# Altium PCB PCB.PcbDoc
Units mm, origin at the board's own origin, x right, y up, seen from the top; angles counter-clockwise.
Board outline 54.5 x 39 mm, 2 copper layers (Top Layer, Bottom Layer), stack 1.671 mm thick; 39 components, 21 nets, 159 pads, 13 vias.
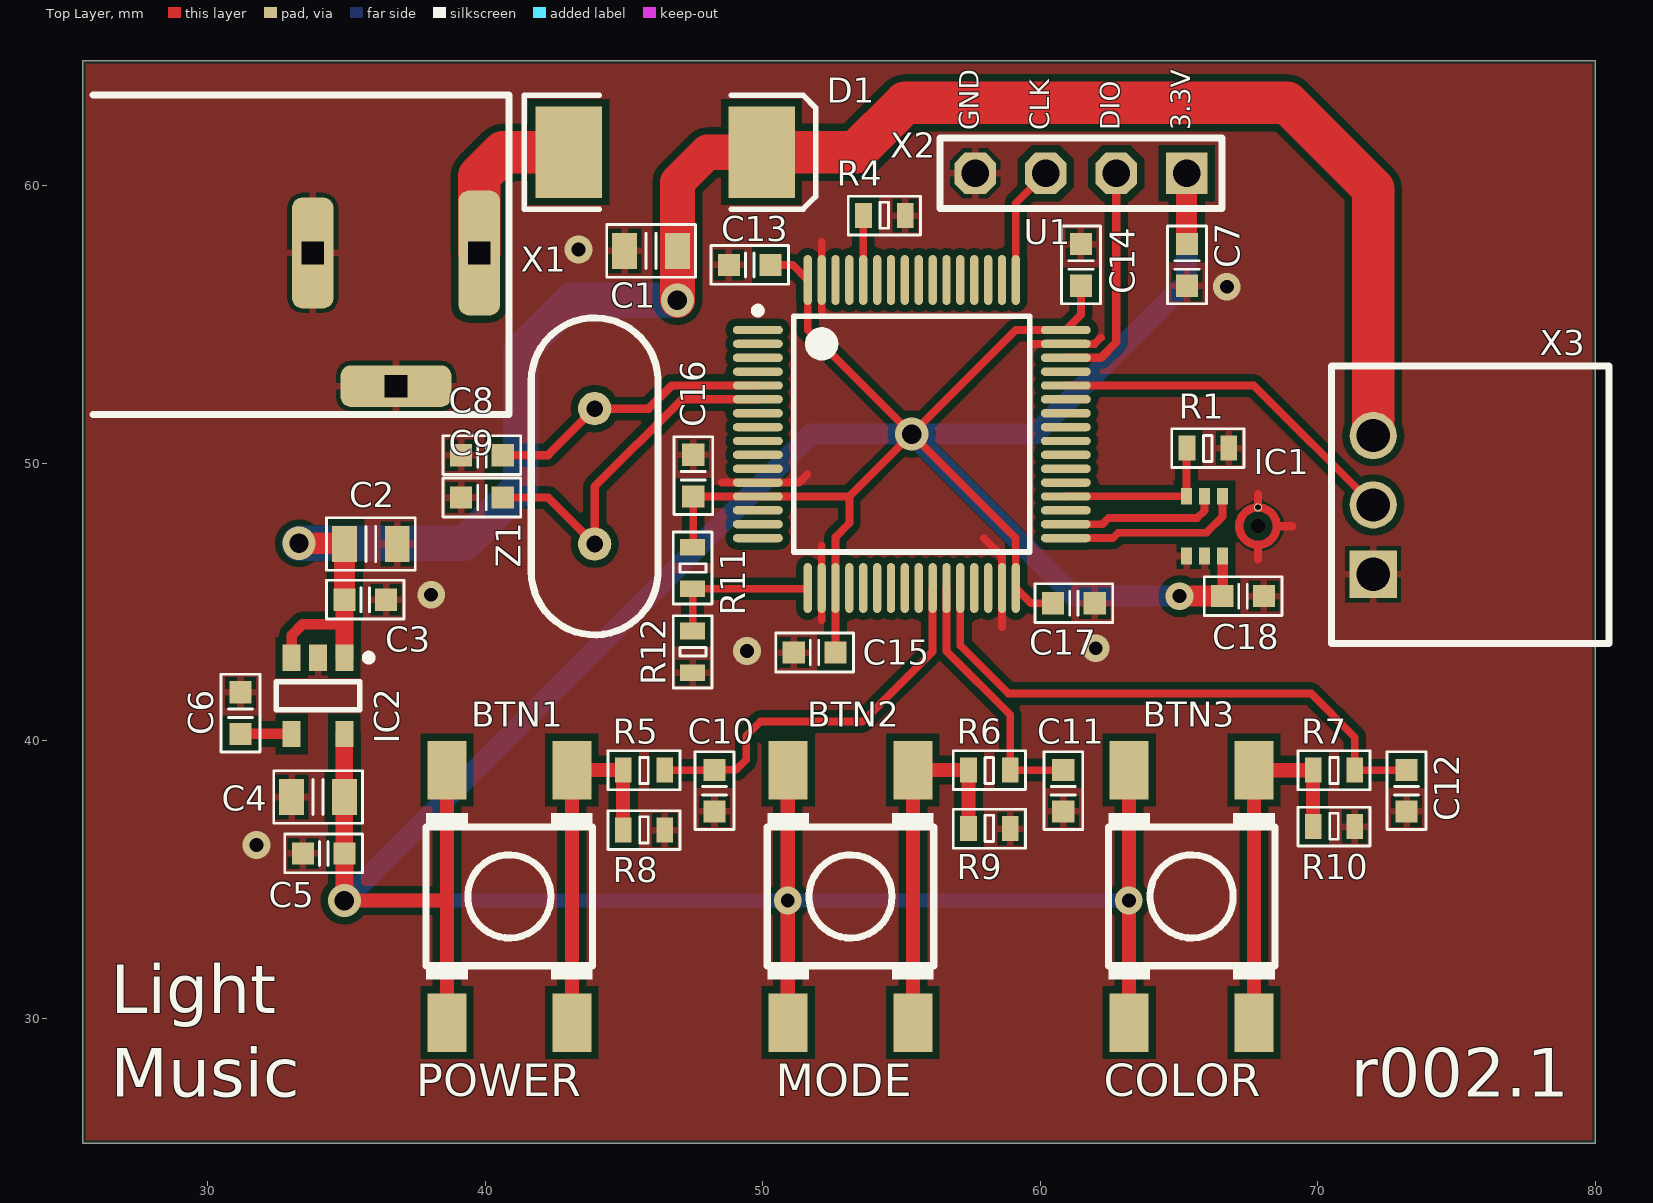
[diagram p0: Top Layer view]
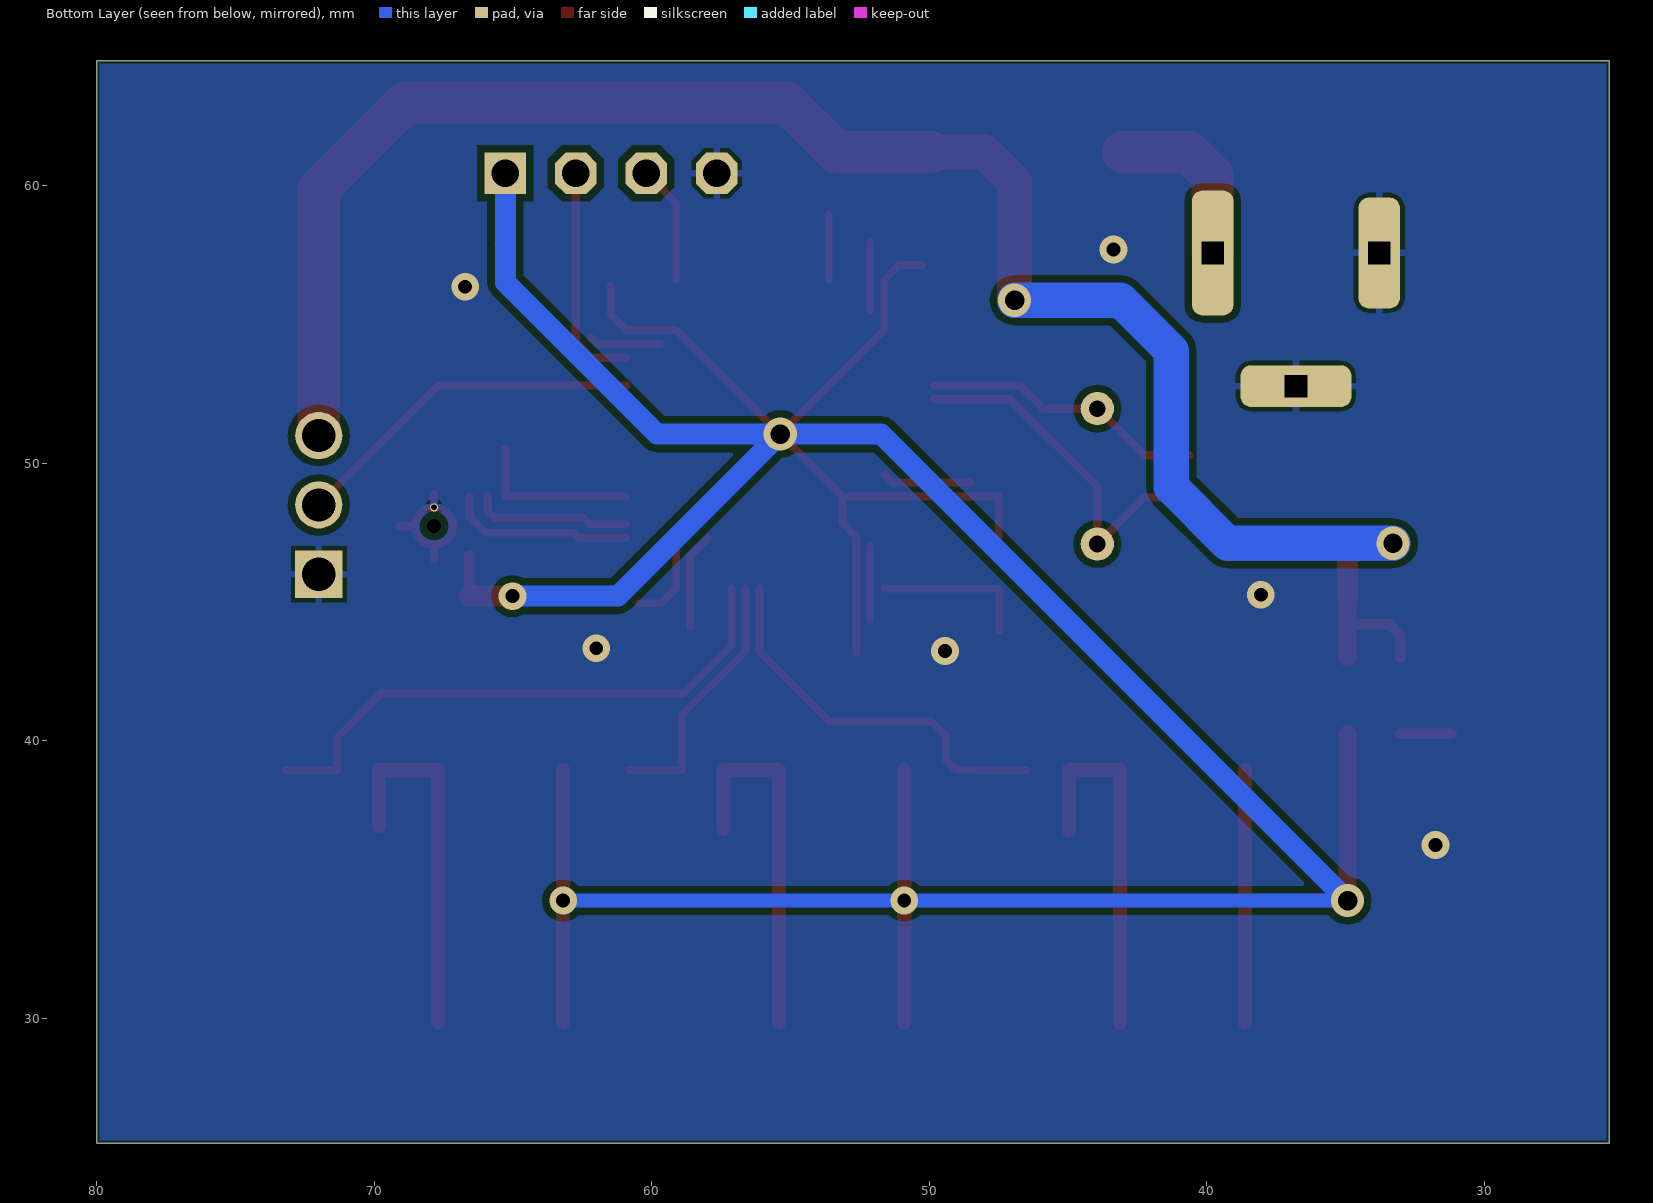
[diagram p1: Bottom Layer view, seen from below]
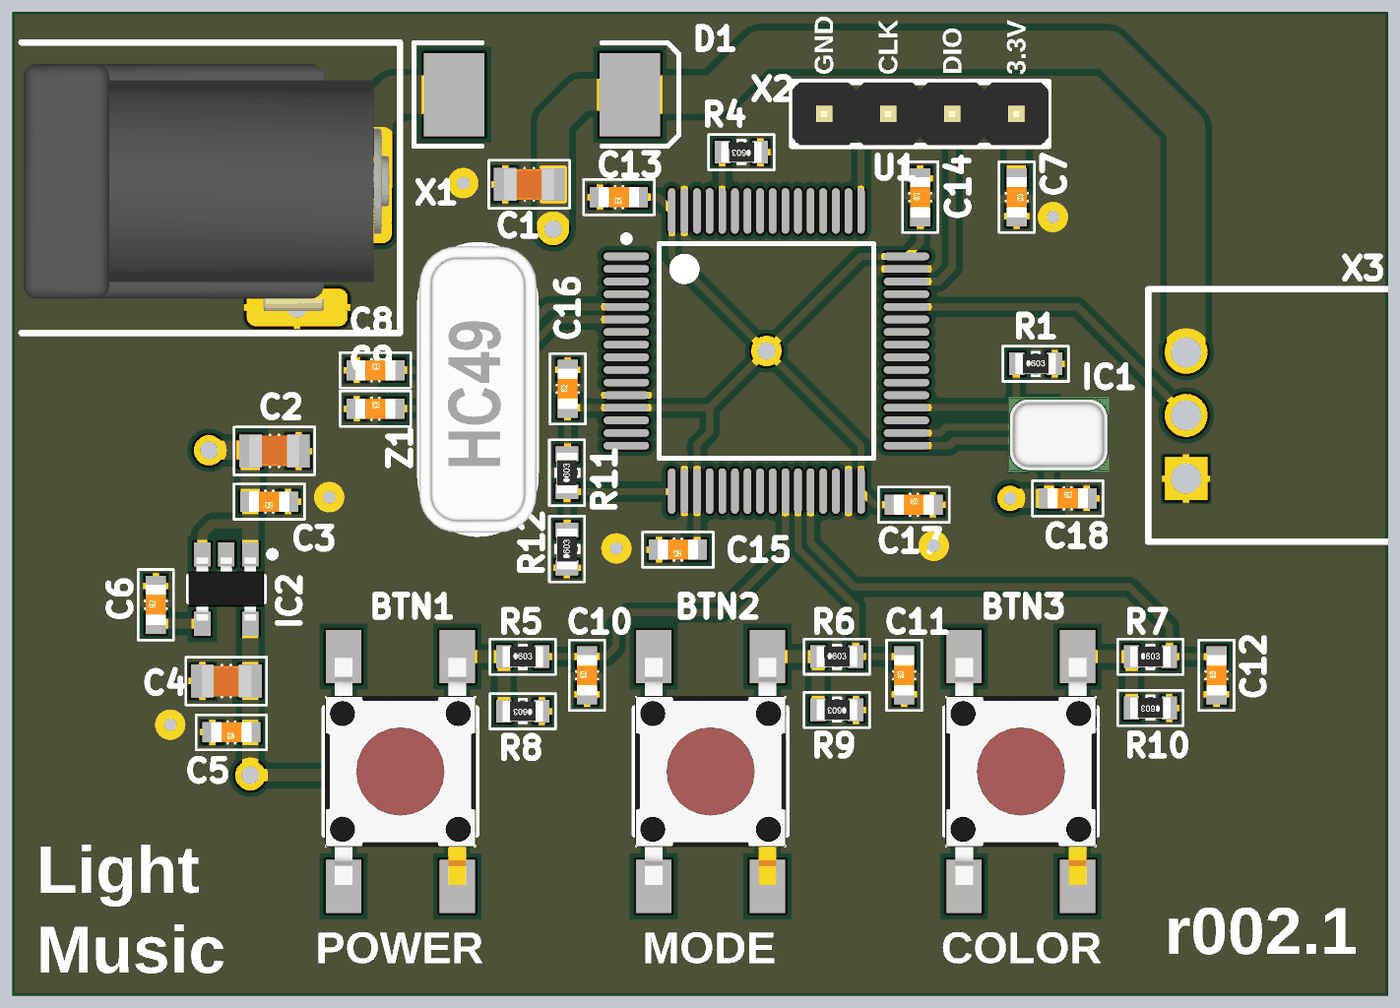
[diagram p2: 3D render of the assembled board from above, using the file's embedded part models]

## Layer stack, top to bottom
Top Solder: solder mask 0.0102, Solder Resist, Dk 3.5
Top Layer: signal copper 0.0356
Dielectric 1: dielectric 1.6, FR-4, Dk 4.8
Bottom Layer: signal copper 0.0356
Bottom Solder: solder mask 0.0102, Solder Resist, Dk 3.5

## Board outline
25.5,25.5 80,25.5 80,64.5 25.5,64.5

## Design rules (kind name [scope] priority, off if disabled: settings)
Clearance [All] p1: gap=0.152 ignorepadtopadclearanceinfootprint=FALSE except(0.254: Arc-Poly Track-Poly SMDPad-Poly THPad-Poly Via-Poly Fill-Poly Poly-Poly)
HoleSize [All] p1: absolutevalues=TRUE maxlimit=3.5 minlimit=0.025 maxpercent=80.000 minpercent=20.000
MinimumSolderMaskSliver [All] p1: minsoldermaskwidth=0
PolygonConnect [All] p1: thpad.connectstyle=Relief thpad.reliefconductorwidth=0.254 thpad.reliefentries=4 thpad.polygonreliefangle="90 Angle" thpad.airgapwidth=0.152 smdpad.connectstyle=Relief smdpad.reliefconductorwidth=0.254 smdpad.reliefentries=4 smdpad.polygonreliefangle="90 Angle" smdpad.airgapwidth=0.152 via.connectstyle=Direct via.reliefconductorwidth=0.254 via.reliefentries=4 via.polygonreliefangle="90 Angle" via.airgapwidth=0.254
RoutingVias [All] p1: holewidth=0.711 width=1.27 viastyle="Through Hole" minholewidth=0.5 minwidth=1 maxholewidth=0.711 maxwidth=1.27
SilkToSilkClearance [All] p1: silktosilkclearance=0
SilkToSolderMaskClearance [IsPad] p1: minsilkscreentomaskgap=0 clearancetoexposedcopper=TRUE
SolderMaskExpansion [All] p1: expansion=0.102
Width [All] p1: maxlimit=2 minlimit=0.2 preferedwidth=0.254
26 further rules are at their usual default settings.

## Components (designator, comment, footprint, x,y, rotation, side; value= is the part's Value field where it differs from the comment)
BTN1 "Push Button" "PUSH BUTTON" 40.869,34.392 r270 top
BTN2 "Push Button" "PUSH BUTTON" 53.162,34.392 r270 top
BTN3 "Push Button" "PUSH BUTTON" 65.456,34.392 r270 top
C1 "1u" C_0805 45.974,57.658 r0 top
C2 "1u" C_0805 35.877,47.092 r180 top
C3 "0.1u" C_0603 35.674,45.085 r180 top
C4 "10u" C_0805 33.972,37.973 r0 top
C5 "0.1u" C_0603 34.175,35.941 r180 top
C6 "22n" C_0603 31.178,40.996 r90 top
C7 "0.1u" C_0603 65.29,57.15 r270 top
C8 "20p" C_0603 39.878,50.292 r0 top
C9 "20p" C_0603 39.878,48.768 r0 top
C10 "1u" C_0603 48.26,38.202 r90 top
C11 "1u" C_0603 60.833,38.202 r90 top
C12 "1u" C_0603 73.203,38.202 r90 top
C13 "0.1u" C_0603 49.53,57.15 r180 top
C14 "0.1u" C_0603 61.468,57.15 r90 top
C15 "0.1u" C_0603 51.867,43.18 r180 top
C16 "0.1u" C_0603 47.498,49.555 r90 top
C17 "0.1u" C_0603 61.214,44.958 r0 top
C18 "0.1u" C_0603 67.31,45.212 r0 top
D1 "Diode" SMC 46.482,61.214 r0 top
IC1 "ICS-43432" ICS-43432 65.273,47.735 r270 top
IC2 "RT9193" SOT23 33.972,41.621 r270 top
R1 "100k" R_0603 66.04,50.546 r0 top
R4 "100k" R_0603 54.381,58.928 r180 top
R5 "1k" R_0603 45.72,38.938 r0 top
R6 "1k" R_0603 58.166,38.942 r0 top
R7 "1k" R_0603 70.587,38.938 r0 top
R8 "10k" R_0603 45.72,36.776 r180 top
R9 "10k" R_0603 58.166,36.83 r180 top
R10 "10k" R_0603 70.587,36.906 r180 top
R11 "1k" R_0603 47.473,46.228 r90 top
R12 "3k" R_0603 47.473,43.205 r90 top
U1 "STM32F105R8T6" STM-LQFP64_N 55.372,51.054 r0 top
X1 "Jack Female" DC-140 36.782,52.782 r0 top
X2 "PLS-4" PLS-4 61.468,60.452 r270 top
X3 "DG-300-3" YH-XH-3 72,48.5 r0 top
Z1 "72MHz" HC-49 43.942,49.53 r90 top

## Footprints (in the part's own frame and the unit in brackets; to place one, negate y for a bottom-side part, rotate by r counter-clockwise, add the part's x,y. Pads: shape width x height; smd on the part's side, far side on the other; paste and mask are expansions set on the pad)
C_0603 [mm] "Chip Capacitor; Body 1.6 x 0.8 mm (LxW typ)"
  rect 0.8x0.8 smd: 1(-0.75,0) 2(0.75,0)
  silkscreen extent -1.4,-0.7 1.4,0.7, body extent -0.8,-0.4 0.8,0.4, height 0.3
C_0805 [mm] "Capacitor Pattern"
  rect 0.9x1.3 smd: 1(-0.95,0) 2(0.95,0)
  silkscreen extent -1.6,-0.95 1.6,0.95, body extent -1,-0.63 1,0.62, height 0.6
DC-140 [mm]
  rrect50% 1.5x4.5 hole 0.8 square: 1(3,4.8)
  rrect50% 1.5x4 hole 0.8 square: 2(-3,4.8)
  rrect50% 4x1.5 hole 0.8 square: 3(0,0)
  silkscreen extent -10.92,-1.02 4.06,10.5, body extent -10.85,-0.15 3.65,9.65, height 11
HC-49 [mm]
  round 1.2 hole 0.6: 1(-2.44,0) 2(2.44,0)
  silkscreen extent -5.71,-2.29 5.71,2.29, body extent -5.67,-2.32 5.68,2.33, height 3.6
ICS-43432 [mm]
  round 0 hole 0.5 unplated: 0(0,2.575)
  rect 0.6x0.4 smd: 1(1.075,0) 2(1.075,0.65) 3(1.075,1.3) 5(-1.075,1.3) 6(-1.075,0.65) 7(-1.075,0)
  round 0.3 hole 0.2: 4(-0.675,2.575)
  Top Layer lines w0.3: 0.675,2.575 ccw(c0,2.575) 0,3.25 ccw(c0,2.575) -0.675,2.575 ccw(c0,2.575) 0.675,2.575
  body extent -1.5,-0.32 1.5,3.68, height 1.1
PLS-4 [mm]
  rect 1.5x1.5 hole 1: 1(0,3.81)
  oct 1.5x1.5 hole 1: 2(0,1.27) 3(0,-1.27) 4(0,-3.81)
  silkscreen extent -1.27,-5.08 1.27,5.08, body extent -1.25,-5.08 1.24,5.08, height 8.54
"PUSH BUTTON" [mm]
  rect 2.1x1.4 smd: 1(-4.55,2.25) 1(4.55,2.25) 2(-4.55,-2.25) 2(4.55,-2.25)
  silkscreen extent -3,-3 3,3, body extent -4.5,-3 4.5,3, height 5
R_0603 [mm]
  rect 0.6x0.9 smd: 1(-0.75,0) 2(0.75,0)
  silkscreen extent -1.3,-0.7 1.3,0.7, body extent -0.8,-0.41 0.8,0.41, height 0.45
SMC [mm] "DO-214-AB/SMC; 2 C-Bend Leads; Body 7.9 x 5.9 mm, inc. leads (LxW)"
  rect 2.4x3.3 smd: 1(-3.475,0) 2(3.475,0)
  silkscreen extent -5.07,-2.05 5.43,2.05
SOT23 [mm] "SOT23, 5-Leads, Body 2.90x2.80mm, Pitch 0.95mm, IPC Medium Density"
  rect 0.95x0.65 smd: 1(-1.375,0.95) 2(-1.375,0) 3(-1.375,-0.95) 4(1.375,-0.95) 5(1.375,0.95)
  silkscreen extent -1.5,-1.5 0.5,1.95, body extent -1.25,-1.5 1.25,1.5, height 1.15
STM-LQFP64_N [mm] "Thin QFP, 64-Leads, Body 10x10mm, Pitch 0.5mm, IPC Medium Density"
  oval 1.8x0.3 smd: 1(-5.55,3.75) 2(-5.55,3.25) 3(-5.55,2.75) 4(-5.55,2.25) 5(-5.55,1.75) 6(-5.55,1.25) 7(-5.55,0.75) 8(-5.55,0.25) 9(-5.55,-0.25) 10(-5.55,-0.75) 11(-5.55,-1.25) 12(-5.55,-1.75) 13(-5.55,-2.25) 14(-5.55,-2.75) 15(-5.55,-3.25) 16(-5.55,-3.75) 33(5.55,-3.75) 34(5.55,-3.25) 35(5.55,-2.75) 36(5.55,-2.25) 37(5.55,-1.75) 38(5.55,-1.25) 39(5.55,-0.75) 40(5.55,-0.25) 41(5.55,0.25) 42(5.55,0.75) 43(5.55,1.25) 44(5.55,1.75) 45(5.55,2.25) 46(5.55,2.75) 47(5.55,3.25) 48(5.55,3.75)
  oval 0.3x1.8 smd: 17(-3.75,-5.55) 18(-3.25,-5.55) 19(-2.75,-5.55) 20(-2.25,-5.55) 21(-1.75,-5.55) 22(-1.25,-5.55) 23(-0.75,-5.55) 24(-0.25,-5.55) 25(0.25,-5.55) 26(0.75,-5.55) 27(1.25,-5.55) 28(1.75,-5.55) 29(2.25,-5.55) 30(2.75,-5.55) 31(3.25,-5.55) 32(3.75,-5.55) 49(3.75,5.55) 50(3.25,5.55) 51(2.75,5.55) 52(2.25,5.55) 53(1.75,5.55) 54(1.25,5.55) 55(0.75,5.55) 56(0.25,5.55) 57(-0.25,5.55) 58(-0.75,5.55) 59(-1.25,5.55) 60(-1.75,5.55) 61(-2.25,5.55) 62(-2.75,5.55) 63(-3.25,5.55) 64(-3.75,5.55)
  silkscreen extent -5.67,-4.25 4.25,4.57, body extent -5,-5 5,5, height 1.6
YH-XH-3 [mm]
  rect 1.7x1.7 hole 1.2 unplated: 1(0,-2.5)
  round 1.7 hole 1.2 unplated: 2(0,0) 3(0,2.5)
  silkscreen extent -1.5,-5 8.5,5

## Part data
BTN1 BTN2 BTN3: "Push button"
C1 C2 C4: library part C0805, "Capacitor"
C3 C5 C6 C7 C8 C9 C10 C11 C12 C13 C14 C15 C16 C17 C18: library part C0603, "Capacitor"
D1: "Default Diode", Code_JEDEC=DO-214-AB, LatestRevisionDate=17-Jul-2002, LatestRevisionNote="Re-released for DXP Platform.", PackageDescription="DO-214-AB/SMC; 2 C-Bend Leads; Body 7.9 x 5.9 mm, inc. leads (LxW)", PackageReference=SMC, PackageVersion=Sep-1996, Published=8-Jun-2000, Publisher="Altium Limited"
IC1: "Low-Noise Microphone with I2  S Digital Output"
IC2: "300mA, CMOS LDO Regulator"
R1 R4 R5 R6 R7 R8 R9 R10 R11 R12: library part R0603, "Resistor"
U1: "ARM Cortex-M3 32-bit MCU, 64 KB Flash, 64 KB Internal RAM, 51 I/Os, 64-pin LQFP, -40 to 85 degC, Tray", I/Os (High Current)=51, Operating Frequency(F) (Processor speed) (MHz)=72, Supplier Part Number 1=497-8922-ND, Supply Voltage(Vcc) min (V)=2, A/D Converter="2x12-bit (16 Channel)", ComponentLink1Description="Manufacturer URL", ComponentLink1URL=http://www.st.com/web/en/home.html, ComponentLink2Description=Datasheet, ComponentLink2URL=http://www.st.com/st-web-ui/static/active/en/resource/technical/document/datasheet/CD00220364.pdf, ComponentLink3Description="Package Specification", ComponentLink3URL=http://www.st.com/st-web-ui/static/active/en/resource/technical/document/datasheet/DM00037051.pdf, Core="ARM Cortex-M3", D/A Converter="2x12-bit (2 Channel)", DatasheetVersion="Rev. 6", FLASH Size (Prog) (kB)=64, Internal RAM Size (kB)=64, Mounting Technology="Surface Mount", PackageDescription="64-Pin Low Profile Quad Flat Package, 10 x 10 mm Body, 0.5 mm Pitch", PackageReference=LQFP64, PackageVersion="Rev. 4, 06/2013", Packing=Tray, PartNumber=STM32F105R8T6, Supplier 1=Digi-Key, Supplier 2=Farnell, Supplier 3=Newark, Supplier 4=Newark, Supplier 5=Mouser, Supplier Part Number 2=1737131, Supplier Part Number 3=52R2327, Supplier Part Number 4=25R9439, Supplier Part Number 5=511-STM32F105R8T6
Z1: library part XTAL, "Quartz resonator"

## Via types
v1: diameter 1, hole 0.5, Top Layer to Bottom Layer, 9 vias
v2: diameter 1.2, hole 0.7, Top Layer to Bottom Layer, 4 vias

## Nets (pads, with @x,y where several pads share a name; then routed paths per layer and width w, separated by ;. In a path a pad name is that pad's centre, name@x,y a point inside that pad or via, vN(x,y) a via of type N, cw(c..) or ccw(c..) an arc to the next point about the centre after c; other vN are vias at no path point)
3.3V: BTN1.2 BTN2.2 BTN3.2 C4.2 C5.1 C7.1 C13.1 C14.1 C15.1 C16.1 C17.1 C18.1 IC1.3 IC2.5 R11.2 U1.13 U1.19 U1.32 U1.48 U1.64 X2.1 | length 169.1
  Top Layer w0.279: R11.2@47.473,47.08 47.498,47.105 C16.1 ; C16.1 47.501,48.804 U1.13 53.122,48.804 ; C13.1 51.076,57.15 U1.64 51.622,54.804 v2(55.372,51.054) ; C15.1 52.622,43.185 U1.19 52.622,47.34 53.122,47.84 53.122,48.804 ; C17.1 59.668,44.958 U1.32 59.122,47.304 v2(55.372,51.054) ; C14.1 61.468,55.35 U1.48 59.122,54.804 v2(55.372,51.054) ; 53.122,48.804 v2(55.372,51.054)
  Top Layer w0.381: C18.1@66.573,45.225 IC1.3
  Top Layer w0.508: v2(34.922,34.239) 38.619,34.239 ; BTN1.2@38.619,29.842 38.619,34.239 ; BTN1.2@38.619,38.942 38.619,34.239 ; BTN2.2@50.912,29.842 50.902,29.852 v1(50.902,34.239) 50.902,38.931 BTN2.2@50.912,38.942 ; BTN3.2@63.206,29.842 63.195,29.852 v1(63.195,34.239) 63.195,38.931 BTN3.2@63.206,38.942 ; C18.1 C18.1@66.573,45.225
  Top Layer w0.635: v2(34.922,34.239) 34.925,34.242 C5.1 ; C5.1@34.922,35.944 C4.2 IC2.5
  Top Layer w0.762: v1(65.024,45.212) C18.1 ; X2.1 65.278,57.912 C7.1
  Bottom Layer w0.508: v2(34.922,34.239) v1(50.902,34.239) v1(63.195,34.239)
  Bottom Layer w0.762: v2(34.922,34.239) 51.737,51.054 v2(55.372,51.054) ; v1(65.024,45.212) 61.214,45.212 v2(55.372,51.054) ; X2.1 65.278,56.515 59.817,51.054 v2(55.372,51.054)
5V: C1.2 C2.2 C3.2 D1.2 IC2.1 IC2.3 X3.3 | length 69.4
  Top Layer w0.381: IC2.3 33.022,43.805 33.413,44.196 34.924,44.196
  Top Layer w0.635: IC2.1 IC2.1 34.924,44.196 C3.2
  Top Layer w0.762: v2(33.286,47.117) C2.2@34.927,47.117 ; C3.2 34.927,45.088 C2.2
  Top Layer w1.27: v2(46.924,55.88) C1.2 46.924,60.132 48.006,61.214 D1.2
  Top Layer w1.524: D1.2 53.352,61.214 55.13,62.992 68.908,62.992 72,59.9 X3.3
  Bottom Layer w1.27: v2(33.286,47.117) 39.243,47.117 41.275,49.149 41.275,54.051 43.104,55.88 v2(46.924,55.88)
BUTTON1: C10.2 R5.2 U1.26 | length 14.2
  Top Layer w0.279: R5.2 C10.2@48.247,38.938 ; C10.2 49.035,38.952 49.403,39.319 49.403,40.183 49.911,40.691 53.594,40.691 56.122,43.219 U1.26
  Top Layer w0.3: C10.2@48.247,38.938 C10.2
BUTTON2: C11.2 R6.2 U1.27 | length 9.4
  Top Layer w0.279: U1.27 56.622,43.225 58.916,40.931 R6.2 60.823,38.942 C11.2
BUTTON3: C12.2 R7.2 U1.28 | length 20.7
  Top Layer w0.279: U1.28 57.122,43.437 58.852,41.707 69.76,41.707 71.337,40.131 R7.2 73.189,38.938 C12.2
GND: C1.1 C2.1 C3.1 C4.1 C5.2 C6.2 C7.2 C8.1 C9.1 C10.1 C11.1 C12.1 C13.2 C14.2 C15.2 C16.2 C17.2 C18.2 IC1.1 IC1.2 IC1.4 IC2.2 R1.2 R4.1 R8.1 R9.1 R10.1 R12.1 U1.12 U1.18 U1.31 U1.47 U1.63 X1.2 X1.3 X2.4 X3.1 | length 16
  Top Layer w0.279: 48.518,49.304 U1.12 51.304,49.304 51.6,49.6 ; 52.122,44.343 U1.18 52.122,47.017 ; 52.122,55.494 U1.63 52.122,57.982 ; 57.97,47.3 58.622,46.648 U1.31 58.622,44.1 ; 59.697,54.304 U1.47 61.963,54.304 62.186,54.527
  Top Layer w0.3: 67.848,46.533 67.848,47.06 ; IC1.4 67.848,48.891 ; 68.523,47.735 69.09,47.735
  other v1: 31.75,36.246 49.428,43.231 62.001,43.332 38.049,45.263 66.726,56.363 43.358,57.709
LED_STRIP: U1.44 X3.2 | length 12.9
  Top Layer w0.279: U1.44 67.696,52.804 X3.2
NetBTN1_1: BTN1.1 R5.1 R8.2 | length 13.1
  Top Layer w0.508: BTN1.1@43.119,29.842 43.119,38.942 44.967,38.942 R5.1 R8.2
NetBTN2_1: BTN2.1 R6.1 R9.2 | length 13.2
  Top Layer w0.508: BTN2.1@55.412,29.842 55.412,38.942 R6.1 R9.2
NetBTN3_1: BTN3.1 R7.1 R10.2 | length 13.3
  Top Layer w0.508: BTN3.1@67.706,29.842 67.706,38.942 67.709,38.938 R7.1 R10.2
NetC6_1: C6.1 IC2.4 | length 1.8
  Top Layer w0.381: C6.1 IC2.4
NetD1_1: D1.1 X1.1 | length 6.4
  Top Layer w1.524: X1.1 39.782,60.356 40.64,61.214 D1.1
NetR4_2: R4.2 U1.60 | length 2.3
  Top Layer w0.279: U1.60 53.622,58.919 R4.2
NetR11_1: R11.1 R12.2 U1.17 | length 5.7
  Top Layer w0.279: R12.2 R11.1 51.596,45.478 U1.17
OSCIN: C8.2 U1.5 Z1.2 | length 10.2
  Top Layer w0.3: C8.2 42.264,50.292 Z1.2 45.886,51.97 46.72,52.804 U1.5
OSCOUT: C9.2 U1.6 Z1.1 | length 13.3
  Top Layer w0.3: C9.2 42.264,48.768 Z1.1 43.942,49.164 47.082,52.304 U1.6
SCK: IC1.6 U1.34 | length 5.7
  Top Layer w0.279: U1.34 62.245,47.804 62.472,48.031 65.659,48.031 65.923,48.296 IC1.6
SD: IC1.7 R1.1 U1.36 | length 6.1
  Top Layer w0.279: U1.36 60.928,48.81 IC1.7 65.273,50.529 R1.1
SWCLK: U1.49 X2.3 | length 4.3
  Top Layer w0.279: U1.49 59.122,59.376 X2.3
SWDIO: U1.46 X2.2 | length 8.1
  Top Layer w0.3: U1.46 62.186,53.804 62.738,54.356 X2.2
WS: IC1.5 U1.33 | length 6.7
  Top Layer w0.279: U1.33 62.62,47.304 62.814,47.498 65.989,47.498 66.573,48.082 IC1.5
pads on no net: IC1.0 U1.1 U1.2 U1.3 U1.4 U1.7 U1.8 U1.9 U1.10 U1.11 U1.14 U1.15 U1.16 U1.20 U1.21 U1.22 U1.23 U1.24 U1.25 U1.29 U1.30 U1.35 U1.37 U1.38 U1.39 U1.40 U1.41 U1.42 U1.43 U1.45 U1.50 U1.51 U1.52 U1.53 U1.54 U1.55 U1.56 U1.57 U1.58 U1.59 U1.61 U1.62

## Polygon pours and split planes (outlines as drawn)
GND on Bottom Layer "Bottom Layer-GND" (solid, remove dead copper, pour order 4): 25.6,64.4 79.9,64.4 79.9,25.6 25.6,25.6
GND on Top Layer "Top Layer-GND" (solid, remove dead copper, pour order 6): 25.6,64.4 79.9,64.4 79.9,25.6 25.6,25.6

## Other copper
Top Layer:
  pour cut-out: 67.8,48.6 67.9,48.6 cw(c67.9,47.7) 68.795,47.795 cw(c67.816,47.795) 67.758,46.818 cw(c67.928,47.779) 66.957,47.69 cw(c67.8,47.754)

## Silkscreen, mask and mechanical layers (free items; w line width, h text height)
Top Overlay:
  text "GND" at 58.014,62 h1.2 r90
  text "CLK" at 60.554,62 h1.2 r90
  text "DIO" at 63.094,62 h1.2 r90
  text "3.3V" at 65.634,62 h1.2 r90
  text "POWER" at 37.506,26.8 h2
  text "MODE" at 50.464,26.8 h2
  text "COLOR" at 62.292,26.8 h2
  text "Light / Music" at 26.5,26.6 h3
  text "r002.1" at 71.2,26.6 h3
Mechanical 1:
  pour cut-out: 67.848,48.41
Drill Drawing:
  the board outline again, w0.254

## Dimensions
25.5,25.5 to 80,25.5 on Mechanical 1
25.5,25.5 to 25.5,64.5 on Mechanical 1